# Allegro board CY8CKIT-043 Layout.brd
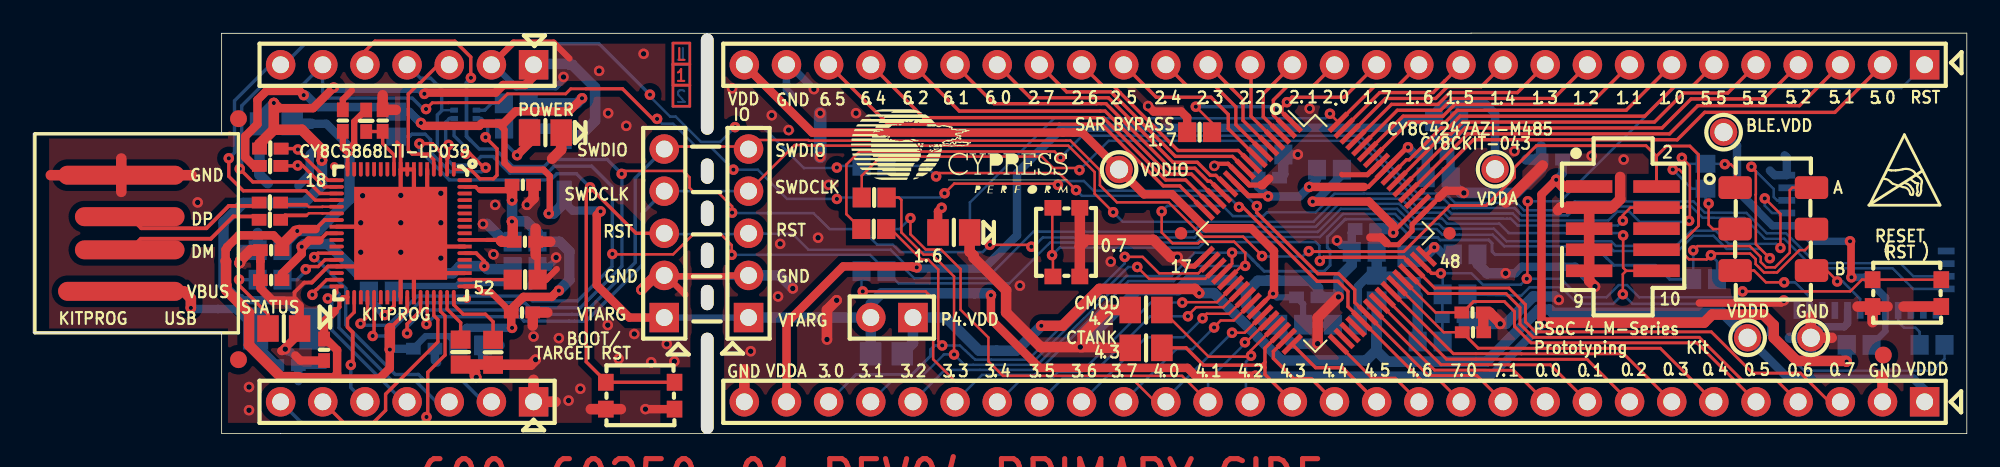
[diagram p0: board, top side]
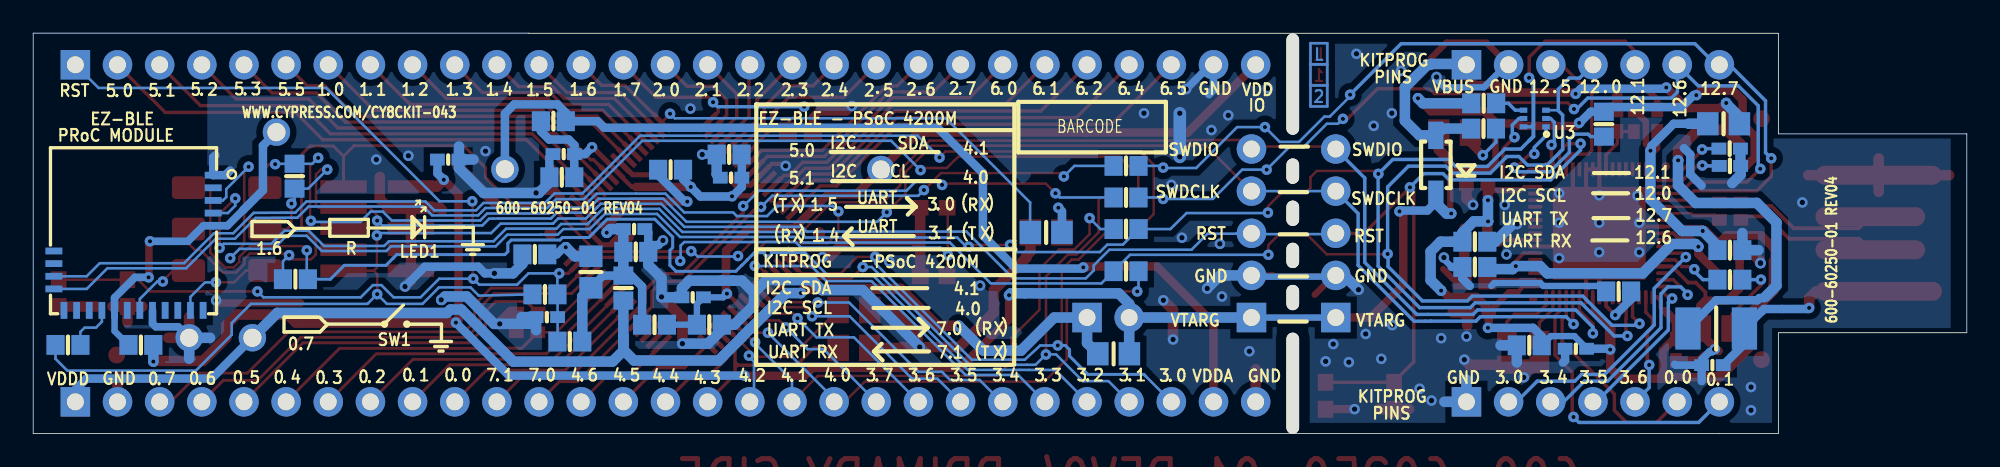
[diagram p1: board, bottom side, seen from below]

Outline 116.51 x 24.13 mm; copper layers: TOP, BOTTOM. Coordinates in mm from the lower left corner of the outline.
Outline path: 0,18.06 0,6.07 11.35,6.07 11.35,0 116.51,0 116.51,24.13 86.63,24.13 86.63,24.12 11.35,24.12 11.35,18.06 0,18.06

## Design rules (mm)
net group DP1: nets KP_DM KP_DP
net group DP2: nets KP_DM_P KP_DP_P
nets with their own width: min track width 0.635; nets GND_SIGNAL KP_VCCD KP_VDD P4_VDDD VBUS VCCD VTARG

## Placement (name value [footprint] x y rotation side)
C1  0.1 uF  [C-CC0402]  18.66 18.86 90 top
C2  0.1 uF  [C-CC0402]  21.06 18.86 90 top
C3  1.0 uF  [C-CC0603]  70.28 18.16 180 top
C4  0.1 uF  [C-CC0402]  29.5 14.99 0 top
C5  0.1 uF  [C-CC0402]  29.63 11.56 0 top
C6  0.1 uF  [C-CC0402]  14.34 11.05 180 top
C7  1.0 uF  [C-CC0603]  29.64 9.27 180 top
C8  0.1 uF  [C-CC0402]  14.34 9.25 180 top
C9  18 pF  [C-CC0402]  86.73 7.29 0 top
C10  2200 pF  [C-CC0805]  67.06 7.44 180 top
C11  0.1 uF  [C-CC0402]  29.45 7.29 0 top
C12  36 pF  [C-CC0402]  86.75 6.1 0 top
C13  10nF  [C-CC0805]  67.06 5.16 180 top
C14  0.1 uF  [C-CC0402]  17.53 5.04 270 top
C15  1.0 uF  [C-CC0603]  25.76 4.9 270 top
C16  1.0 uF  [C-CC0603]  27.71 4.89 270 top
C17  1.0 uF  [C-CC0603]  74.57 16.81 0 bottom
C18  0.1 uF  [C-CC0402]  84.54 16.84 0 bottom
C19  0.1 uF  [C-CC0402]  91.5 16.51 180 bottom
C20  0.1 uF  [C-CC0402]  74.46 15.42 0 bottom
C21  1.0 uF  [C-CC0603]  84.66 15.44 0 bottom
C22  0.1 uF  [C-CC0402]  80.3 12.32 180 bottom
C23  1.0 uF  [C-CC0603]  29.64 11.56 180 bottom
C24  1.0 uF  [C-CC0603]  80.2 10.95 180 bottom
C25  1.0 uF  [C-CC0603]  14.27 11.05 180 bottom
C26  1.0 uF  [C-CC0603]  86.28 10.79 0 bottom
C27  1.0 uF  [C-CC0603]  29.64 10.03 180 bottom
C28  1.0 uF  [C-CC0603]  20.98 8.56 0 bottom
C29  0.1 uF  [C-CC0402]  76.77 8.2 0 bottom
C30  0.1 uF  [C-CC0402]  85.56 7.01 0 bottom
C31  1.0 uF  [C-CC0603]  75.77 6.55 180 bottom
C32  1.0 uF  [C-CC0603]  26.37 5.31 0 bottom
C33  0.1 uF  [C-CC0402]  23.56 5.11 0 bottom
C34  0.1 uF  [C-CC0402]  15.33 4.11 0 bottom
D1  MBR0520L  [SOD-123]  31.99 16.19 90 bottom
F1  PTC Resettable Fuse  [R-CR1210]  15.1 6.32 180 bottom
J1  CONN 29  [RECP29X1-VERT]  113.97 22.23 270 top
J2  CONN 29  [RECP29X1-VERT]  113.97 1.91 270 top
J3  HDR 1x5  [HDR5X1]  43.1 6.99 0 top
J4  -  [HDR2]  53.01 6.99 90 top
J5  50MIL KEYED SMD  [FCI-20021521]  95.78 12.34 270 top
J6  USB FINGER  [USB-FINGER]  5.51 8.56 0 top
J7  HDR 1x5  [HDR5X1]  38.02 6.99 0 top
J8  HDR 1x7  [HDR7X1]  30.15 1.91 90 top
J9  HDR 1x7  [HDR7X1]  30.15 22.23 90 top
L1  330 OHM @ 100MHz  [R-CR0603]  85.17 18.82 180 bottom
L2  330 OHM @ 100MHz  [R-CR0603]  80.95 8.76 270 bottom
L3  330 OHM @ 100MHz  [R-CR0603]  110.02 5.33 0 bottom
LED1  LED  [CR-LED0805_1]  55.47 12.12 180 top
LED2  POWER LED Amber  [CR-LED0805_1]  30.86 18.14 180 top
LED3  Status LED Green  [CR-LED0805]  15.1 6.32 180 top
NOREF  -  []  216.88 -140.11 0 top
NOREF#2  -  []  215.1 -114.71 0 top
NOREF#3  -  []  40.82 24.51 0 top
NOREF#4  -  []  0 6.69 0 top
NOREF#5  -  [unnamed#2]  26.13 8.12 90 top
NOREF#6  -  [unnamed#3]  40.61 3.02 0 top
NOREF#7  -  []  -214.2 -216.79 0 top
NOREF#8  -  [unnamed#4]  40.61 13.27 0 top
NOREF#9  -  [unnamed#5]  12.37 18.97 0 top
NOREF#10  -  []  11.35 24.26 0 top
NOREF#11  -  []  113.93 -47.94 0 top
NOREF#12  -  []  0 18.06 0 top
NOREF#13  -  []  8.05 25.53 0 top
NOREF#14  -  []  108.89 0 90 top
NOREF#15  -  [unnamed#4]  40.61 15.81 0 top
NOREF#16  -  [unnamed#3]  40.61 21.06 0 top
NOREF#17  -  []  -1.63 6.07 90 top
NOREF#18  -  []  96.47 16.56 0 top
NOREF#19  -  [unnamed#2]  18.14 16.1 90 top
NOREF#20  -  []  40.69 -8.76 0 top
NOREF#21  -  [unnamed#4]  40.61 10.73 0 top
NOREF#22  -  [unnamed#5]  12.37 4.45 0 top
NOREF#23  -  [unnamed#5]  111.48 4.72 0 top
NOREF#24  -  [unnamed#4]  40.61 8.19 0 top
NOREF#25  -  []  58.66 12.06 180 bottom
NOREF#26  -  []  -87.45 -141.35 180 bottom
NOREF#27  -  []  38.6 12.06 180 bottom
R1  4.7K  [R-CR0402]  20.07 18.85 270 top
R2  15K  [R-CR0402]  14.29 17.17 0 top
R3  15K  [R-CR0402]  14.27 16.13 0 top
R4  22E  [R-CR0402]  14.26 13.92 0 top
R5  22E  [R-CR0402]  14.26 12.88 0 top
R6  2.2K  [R-CR0603]  29.11 19.9 180 bottom
R7  ZERO  [R-CR0805]  14.66 18.67 180 bottom
R8  2.2K  [R-CR0603]  21.87 18.64 270 bottom
R9  560 ohm  [R-CR0603]  29.12 18.38 0 bottom
R10  30K  [R-CR0402]  14.29 17.17 180 bottom
R11  ZERO  [R-CR0603]  50.66 16.13 180 bottom
R12  30K  [R-CR0402]  14.27 16.13 180 bottom
R13  ZERO  [R-CR0603]  50.66 14.22 180 bottom
R14  ZERO  [R-CR0603]  50.66 9.78 0 bottom
R15  560 ohm  [R-CR0805]  55.47 12.12 0 bottom
R16  ZERO  [R-CR0603]  100.71 9.3 0 bottom
R17  ZERO  [R-CR0603]  50.66 12.32 180 bottom
R18  ZERO  [R-CR0603]  100.76 15.51 270 bottom
R19  820 ohm  [R-CR0603]  14.27 9.27 180 bottom
R20  ZERO  [R-CR0603]  85.67 8.38 0 bottom
R21  ZERO  [R-CR0603]  79.07 6.55 180 bottom
R22  ZERO  [R-CR0805]  51.41 4.8 180 bottom
R23  4.7K  [R-CR0603]  84.18 5.54 0 bottom
R24  ZERO  [R-CR0603]  78.11 15.9 0 bottom
R25  ZERO  [R-CR0805]  82.91 9.73 90 bottom
R26  ZERO  [R-CR0603]  114.41 5.33 0 bottom
R27  ZERO  [R-CR0603]  50.65 12.32 180 top
R28  ZERO  [R-CR0603]  50.67 14.22 180 top
SW1  SW  [SWITCH-4PIN]  62.26 11.53 0 top
SW2  SW  [SWITCH-4PIN]  112.9 8.46 270 top
SW3  Switch  [SWITCH-4PIN]  36.58 2.27 270 top
SW4  DPDT  [CFP250P580X350-6L0N_1]  104.85 12.32 270 top
TP1  RED  [TP_43_65]  88.09 15.93 0 top
TP2  RED  [TP_43_65]  103.3 5.77 0 top
TP3  RED  [TP_43_65]  65.43 15.91 0 top
TP4  RED  [TP_43_65]  101.85 18.16 0 top
TP5  RED  [TP_43_65]  107.11 5.77 0 top
U1  CY8C5868LTI-LP039 QFN68  [QFN68_8X8MM]  22.14 12.06 270 top
U2  CY8C4247AZI-M485  [QFP50P1212X1212X160-64L15N]  77.25 12.06 225 top
U3  NTZD3152P  [SOT563]  26.04 18.99 0 bottom
U4  CYBLE-022001-00  [BLE_MODULE_B]  110.9 12.62 0 bottom

## Library data of the parts
C1 C2 C4-C6 C8 C11 C14 C18-C20 C22 C29 C30 C33 C34 = 0.1 uFd 0402: alternate symbols: (C-CC0402_A)
C3 C7 C15-C17 C21 C23-C28 C31 C32 = 1_0.0 uFd 0603 X5R 25V 10%: alternate symbols: (C-CC0603_A)
C9 C12 = CAP NP
C10 C13 = CAP
D1 = TMP_134158
F1 = FUSE_4
J1 = CONN TRBLK 28_1
J2 = CONN TRBLK 28_0
J3 J7 = HDR 1x5 Keyed 0.1_M
J4 = HEADER 2_0
J5 = 10 Pin Header 50mil Keyed SMD
J6 = USB MINI AB Right Angle_0
J8 J9 = 8x1 RECPT VERT_0
L1-L3 = INDUCTOR FERRITE
LED1 = LED Green 0805_2
LED2 LED3 = LED Green 0805
R1 R23 = 4_0.7K ohm 5% 0603: alternate symbols: (R-CR0603_A)
R2 R3 R9 R10 R12 R15 = RESISTOR
R4 R5 = 24 ohm 5% 0603 _0
R6 R8 = 2_0.2K ohm 5% 0603: alternate symbols: (R-CR0603_A)
R7 R11 R13 R14 R16-R18 R20-R22 R24-R28 = 330 ohm 5% 0805_1
R19 = 330 ohm 5% 0805_0
SW1-SW3 = Switch Pushbutton
SW4 = SPDT_1
TP1-TP5 = TEST_POINT
U1 = CY8C5868LTI-LP039 QFN68
U2 = PSoC 4200_1
U3 = FET DUAL P-CH 20V 430mA SOT-563
U4 = CY8CTMA300-48LQXI_11

## Footprints (pads in the part's own frame, mm; a bottom-side part is the same pattern mirrored in y, then rotated)
BLE_MODULE_B
  rect 1.016x0.406 smd: 1(-5.232,-2.946) 2(-5.232,-2.184) 3(-5.232,-1.422) 4(-5.232,-0.66) 5(-5.232,0.102) 18(4.369,3.912) 19(4.369,3.15) 20(4.369,2.388) 21(4.369,1.626)
  rect 0.406x1.016 smd: 6(-4.623,5.207) 7(-3.861,5.207) 8(-3.099,5.207) 9(-2.337,5.207) 10(-1.575,5.207) 11(-0.813,5.207) 12(-0.051,5.207) 13(0.711,5.207) 14(1.473,5.207) 15(2.235,5.207) 16(2.997,5.207) 17(3.759,5.207)
C-CC0402
  rect 0.889x0.711 smd: 1(-0.648,0) 2(0.648,0)
C-CC0603
  rect 1.092x1.194 smd: 1(-0.749,0) 2(0.749,0)
C-CC0805
  rect 1.295x1.6 smd: 1(-0.953,0) 2(0.953,0)
CFP250P580X350-6L0N_1
  custom 1.372x2.012 smd: 1(-2.499,-2.301) 2(0,-2.301) 3(2.499,-2.301) 4(-2.499,2.301) 5(0,2.301) 6(2.499,2.301)
CR-LED0805
  rect 1.295x1.6 smd: 1(-0.953,0) 2(0.953,0)
CR-LED0805_1
  rect 1.295x1.6 smd: 1(-0.953,0) 2(0.953,0)
FCI-20021521
  rect 0.759x2.799 smd: 1(-2.54,-2.029) 2(-2.54,2.029) 3(-1.27,-2.029) 4(-1.27,2.029) 5(0,-2.029) 6(0,2.029) 7(1.27,-2.029) 8(1.27,2.029) 9(2.54,-2.029) 10(2.54,2.029)
HDR2
  rect 1.778x1.778 hole 1.016: 1(0,0)
  round 1.778 hole 1.016: 2(0,2.54)
HDR5X1
  rect 1.778x1.778 hole 1.016: 1(0,0)
  round 1.778 hole 1.016: 2(0,2.54) 3(0,5.08) 4(0,7.62) 5(0,10.16)
HDR7X1
  rect 1.778x1.778 hole 1.016: 1(0,0)
  round 1.778 hole 1.016: 2(0,2.54) 3(0,5.08) 4(0,7.62) 5(0,10.16) 6(0,12.7) 7(0,15.24)
QFN68_8X8MM
  custom 0.864x0.23 smd: 1(-3.851,3.2) 2(-3.851,2.799) 3(-3.851,2.4) 4(-3.851,1.999) 5(-3.851,1.6) 6(-3.851,1.199) 7(-3.851,0.8) 8(-3.851,0.399) 9(-3.851,0) 10(-3.851,-0.399) 11(-3.851,-0.8) 12(-3.851,-1.199) 13(-3.851,-1.6) 14(-3.851,-1.999) 15(-3.851,-2.4) 16(-3.851,-2.799) 17(-3.851,-3.2) 35(3.851,-3.2) 36(3.851,-2.799) 37(3.851,-2.4) 38(3.851,-1.999) 39(3.851,-1.6) 40(3.851,-1.199) 41(3.851,-0.8) 42(3.851,-0.399) 43(3.851,0) 44(3.851,0.399) 45(3.851,0.8) 46(3.851,1.199) 47(3.851,1.6) 48(3.851,1.999) 49(3.851,2.4) 50(3.851,2.799) 51(3.851,3.2)
  custom 0.23x0.864 smd: 18(-3.2,-3.851) 19(-2.799,-3.851) 20(-2.4,-3.851) 21(-1.999,-3.851) 22(-1.6,-3.851) 23(-1.199,-3.851) 24(-0.8,-3.851) 25(-0.399,-3.851) 26(0,-3.851) 27(0.399,-3.851) 28(0.8,-3.851) 29(1.199,-3.851) 30(1.6,-3.851) 31(1.999,-3.851) 32(2.4,-3.851) 33(2.799,-3.851) 34(3.2,-3.851) 52(3.2,3.851) 53(2.799,3.851) 54(2.4,3.851) 55(1.999,3.851) 56(1.6,3.851) 57(1.199,3.851) 58(0.8,3.851) 59(0.399,3.851) 60(0,3.851) 61(-0.399,3.851) 62(-0.8,3.851) 63(-1.199,3.851) 64(-1.6,3.851) 65(-1.999,3.851) 66(-2.4,3.851) 67(-2.799,3.851) 68(-3.2,3.851)
  rect 5.601x5.601 smd: 69(0,0)
QFP50P1212X1212X160-64L15N
  round 0.749 smd: (-5.72,5.72) (5.72,-5.72)
  rect 0.3x1.539 smd: 1(-3.749,-5.715) 2(-3.251,-5.715) 3(-2.751,-5.715) 4(-2.25,-5.715) 5(-1.75,-5.715) 6(-1.25,-5.715) 7(-0.749,-5.715) 8(-0.249,-5.715) 9(0.249,-5.715) 10(0.749,-5.715) 11(1.25,-5.715) 12(1.75,-5.715) 13(2.25,-5.715) 14(2.751,-5.715) 15(3.251,-5.715) 16(3.749,-5.715) 33(3.749,5.715) 34(3.251,5.715) 35(2.751,5.715) 36(2.25,5.715) 37(1.75,5.715) 38(1.25,5.715) 39(0.749,5.715) 40(0.249,5.715) 41(-0.249,5.715) 42(-0.749,5.715) 43(-1.25,5.715) 44(-1.75,5.715) 45(-2.25,5.715) 46(-2.751,5.715) 47(-3.251,5.715) 48(-3.749,5.715)
  rect 1.539x0.3 smd: 17(5.715,-3.749) 18(5.715,-3.251) 19(5.715,-2.751) 20(5.715,-2.25) 21(5.715,-1.75) 22(5.715,-1.25) 23(5.715,-0.749) 24(5.715,-0.249) 25(5.715,0.249) 26(5.715,0.749) 27(5.715,1.25) 28(5.715,1.75) 29(5.715,2.25) 30(5.715,2.751) 31(5.715,3.251) 32(5.715,3.749) 49(-5.715,3.749) 50(-5.715,3.251) 51(-5.715,2.751) 52(-5.715,2.25) 53(-5.715,1.75) 54(-5.715,1.25) 55(-5.715,0.749) 56(-5.715,0.249) 57(-5.715,-0.249) 58(-5.715,-0.749) 59(-5.715,-1.25) 60(-5.715,-1.75) 61(-5.715,-2.25) 62(-5.715,-2.751) 63(-5.715,-3.251) 64(-5.715,-3.749)
R-CR0402
  rect 0.889x0.711 smd: 1(-0.648,0) 2(0.648,0)
R-CR0603
  rect 1.092x1.194 smd: 1(-0.749,0) 2(0.749,0)
R-CR0805
  rect 1.295x1.397 smd: 1(-0.953,0) 2(0.953,0)
R-CR1210
  rect 1.524x2.54 smd: 1(-1.702,0) 2(1.702,0)
RECP29X1-VERT
  rect 1.778x1.778 hole 1.016: 1(0,0)
  round 1.778 hole 1.016: 2(0,-2.54) 3(0,-5.08) 4(0,-7.62) 5(0,-10.16) 6(0,-12.7) 7(0,-15.24) 8(0,-17.78) 9(0,-20.32) 10(0,-22.86) 11(0,-25.4) 12(0,-27.94) 13(0,-30.48) 14(0,-33.02) 15(0,-35.56) 16(0,-38.1) 17(0,-40.64) 18(0,-43.18) 19(0,-45.72) 20(0,-48.26) 21(0,-50.8) 22(0,-53.34) 23(0,-55.88) 24(0,-58.42) 25(0,-60.96) 26(0,-63.5) 27(0,-66.04) 28(0,-68.58) 29(0,-71.12)
SOD-123
  rect 1.651x0.914 smd: 1(-1.778,0) 2(1.778,0)
SOT563
  rect 0.457x0.305 smd: 1(-0.676,0.5) 2(-0.676,0) 3(-0.676,-0.5) 4(0.676,-0.5) 5(0.676,0) 6(0.676,0.5)
SWITCH-4PIN
  rect 1.016x0.94 smd: 1A(-0.81,2.07) 1B(-0.81,-2.07) 2A(0.81,2.07) 2B(0.81,-2.07)
TP_43_65
  round 1.651 hole 1.092: 1(0,0)
unnamed#2
  round 0.508 smd: (0,0)
unnamed#3
  oval 0.762x6.096 hole 0.762x6.096 unplated: (0,0)
unnamed#4
  oval 0.762x1.524 hole 0.762x1.524 unplated: (0,0)
unnamed#5
  round 1.016 smd: (0,0)
USB-FINGER
  oval 7.62x1.143 smd: 1(-0.203,0) 4(-0.203,7.003)
  oval 6.604x1.143 smd: 2(0.305,2.502) 3(0.305,4.501)

## Nets
GND_SIGNAL: C1.2 C2.2 C3.2 C4.2 C5.2 C6.2 C7.1 C8.2 C9.2 C10.2 C11.2 C12.2 C13.2 C14.2 C15.2 C16.2 C17.2 C18.2 C19.2 C20.2 C21.2 C22.2 C23.2 C24.2 C25.2 C26.2 C27.1 C28.2 C29.2 C30.2 C31.2 C32.2 C33.2 C34.2 J1.28 J2.2 J2.29 J3.2 J5.3 J5.5 J5.7 J5.9 J6.4(GND) J7.2 J8.1 J9.2 LED1.1(K) LED2.1(K) LED3.1(K) R10.2 R12.2 SW1.2A SW1.2B SW2.2A SW2.2B SW3.2A SW3.2B TP5.1 U1.5(VSSB) U1.7(VBOOST) U1.8(VBAT) U1.9(VSSD#9) U1.25(VSSD#25) U1.31(P3_2) U1.43(VSSA) U1.45(VSSD#45) U1.54(P0_5) U1.58(VSSD#58) U1.69(EPAD) U2.10(VSSA#10) U2.17(VSSIO) U2.49(VSSD) U2.57(VSSA#57) U4.1(GND1) U4.10(GND2)
VBUS: D1.2(ANODE) F1.1 J9.1 R2.1 R7.2 R9.2
VCCA: C28.1 U1.42(VCCA)
VCCD: C26.1 R25.2 U2.48(VCCD)
VDDA: J2.28 L1.2 TP1.1
VDDD: J2.1 J4.1 L2.2 R22.1 TP2.1
/XRES: C30.1 J1.1 R20.1 R23.2 SW2.1A SW2.1B U2.47(XRES)
BLE_RX: R28.2 U4.18(P1.4)
BLE_SWDCLK: SW4.3 U4.7(P0.7)
BLE_SWDIO: SW4.6 U4.11(P0.6)
BLE_TX: R27.2 U4.19(P1.5)
BLE_VDD: L3.2 TP4.1 U4.5(VDDR) U4.13(VDD)
BLE_XRES: R26.1 U4.14(XRES)
I2C_SCL: J9.4 R14.2 U1.38(SIO, I2C1_SCL P12_0) U3.3(D2) U4.3(P5.1)
I2C_SDA: J9.5 R17.2 U1.39(SIO, I2C1_SDA P12_1) U3.6(D1) U4.4(P5.0)
KP_DM: J6.2(DM) R5.1
KP_DM_P: R5.2 U1.23(P15_7 DM)
KP_DP: J6.3(DP) R4.1
KP_DP_P: R4.2 U1.22(P15_6 DP)
KP_P0_0: J8.6 U1.48(P0_0)
KP_P0_1: J8.7 U1.49(P0_1)
KP_P0_2: C15.1 U1.50(P0_2)
KP_P0_3: C16.1 U1.51(P0_3)
KP_P0_4: C7.2 U1.53(P0_4)
KP_P0_6: U1.55(P0_6)
KP_P0_7: U1.56(P0_7)
KP_P1_6: R2.2 R10.1 U1.18(P1_6)
KP_P1_7: R3.2 R12.1 U1.19(P1_7)
KP_P2_6: U1.1(P2_6) U3.5(G2)
KP_P2_7: U1.2(P2_7) U3.2(G1)
KP_P3_0: J8.2 U1.29(P3_0)
KP_P3_1: R19.1 U1.30(P3_1)
KP_P3_4: J8.3 U1.33(P3_4)
KP_P3_5: J8.4 U1.34(P3_5)
KP_P3_6: J8.5 U1.36(P3_6)
KP_P12_5: J9.3 U1.4(P12_5 I2C0_SDA, SIO)
KP_VCCD: C8.1 C27.2 U1.26(VCCD#26) U1.57(VCCD#57)
KP_VDD: C1.1 C4.1 C5.1 C6.1 C11.1 C14.1 C23.1 C25.1 C32.1 C33.1 R1.1 R7.1 U1.17(VDDIO1) U1.24(VDDD#24) U1.35(VDDIO3) U1.44(VDDA) U1.52(VDDIO0) U1.59(VDDD#59) U1.67(VDDIO2)
KP_XRES: C2.1 R1.2 U1.10(XRES)
P0_0: J2.10 U2.39(P0.0)
P0_1: J2.9 U2.40(P0.1)
P0_2: J2.8 U2.41(P0.2)
P0_3: J2.7 U2.42(P0.3)
P0_4: C12.1 J2.6 U2.43(P0.4)
P0_5: C9.1 J2.5 U2.44(P0.5)
P0_6: J2.4 U2.45(P0.6)
P0_7: J2.3 SW1.1A SW1.1B U2.46(P0.7)
P1_0: J1.7 U2.58(P1.0)
P1_1: J1.8 U2.59(P1.1)
P1_2: J1.9 U2.60(P1.2)
P1_3: J1.10 U2.61(P1.3)
P1_4: J1.11 U2.62(P1.4)
P1_5: J1.12 U2.63(P1.5)
P1_6: J1.13 R15.2 U2.64(P1.6)
P1_7: C3.1 J1.14 U2.1(P1.7/VREF)
P2_0: J1.15 U2.2(P2.0)
P2_1: J1.16 U2.3(P2.1)
P2_2: J1.17 U2.4(P2.2)
P2_3: J1.18 U2.5(P2.3)
P2_4: J1.19 U2.6(P2.4)
P2_5: J1.20 U2.7(P2.5)
P2_6: J1.21 U2.8(P2.6)
P2_7: J1.22 U2.9(P2.7)
P3_0: J2.27 R27.1 U2.18(P3.0)
P3_1: J2.26 R28.1 U2.19(P3.1)
P3_2: J2.25 R16.1 SW4.4 U2.20(P3.2)
P3_3: J2.24 R18.1 SW4.1 U2.21(P3.3)
P3_4: J2.23 U2.22(P3.4)
P3_5: J2.22 U2.23(P3.5)
P3_6: J2.21 U2.24(P3.6)
P3_7: J2.20 U2.25(P3.7)
P4_0: J2.19 R14.1 U2.27(P4.0)
P4_1: J2.18 R17.1 U2.28(P4.1)
P4_2: C10.1 J2.17 U2.29(P4.2)
P4_3: C13.1 J2.16 U2.30(P4.3)
P4_4: J2.15 U2.31(P4.4)
P4_5: J2.14 U2.32(P4.5)
P4_6: J2.13 U2.33(P4.6)
P4_VDDA: C17.1 C18.1 C20.1 C21.1 L1.1 R24.1 U2.11(VDDA#11) U2.56(VDDA#56)
P4_VDDD: C22.1 C24.1 L2.1 R21.1 R23.1 R24.2 R25.1 U2.50(VDDD)
P4_VDDIO: C29.1 C31.1 J1.29 R21.2 TP3.1 U2.26(VDDIO)
P5_0: J1.2 U2.51(P5.0)
P5_1: J1.3 U2.52(P5.1)
P5_2: J1.4 U2.53(P5.2)
P5_3: J1.5 U2.54(P5.3)
P5_5: J1.6 U2.55(P5.5)
P6_0: J1.23 U2.12(P6.0)
P6_1: J1.24 U2.13(P6.1)
P6_2: J1.25 U2.14(P6.2)
P6_4: J1.26 U2.15(P6.4)
P6_5: J1.27 U2.16(P6.5)
P7_0: J2.12 R11.1 U2.37(P7.0)
P7_1: J2.11 R13.1 U2.38(P7.1)
RESET: J3.3 J5.10 J7.3 R20.2 R26.2 SW3.1A SW3.1B U1.3(P12_4 I2C0_SCL, SIO)
SWDCLK: J3.4 J5.4 J7.4 R18.2 SW4.2 U1.47(SIO_P12_3)
SWDIO: J3.5 J5.2 J7.5 R16.2 SW4.5 U1.46(SIO_P12_2)
UART RX: J9.6 R13.2 U1.20(P12_6_SIO)
UART TX: J9.7 R11.2 U1.21(P12_7_SIO)
VTARG: C19.1 D1.1(CATHODE) J3.1 J4.2 J5.1 J7.1 L3.1 R3.1 R6.1 R8.1 R22.2
N11032: C34.1 F1.2 J6.1(VBUS)
N11130: LED2.2(A) R9.1
N039981: R8.2 U3.1(S1)
N046484: R6.2 U3.4(S2)
N13017862: LED1.2(A) R15.1
N16779589: LED3.2(A) R19.2

Pads without a net: J5 6 8; U1 6 11 12 13 14 15 16 27 28 32 37 40 41 60 61 62 63 64 65 66 68; U2 34 35 36; U4 2 6 8 9 12 15 16 17 20 21

## Via types
v1: diameter 0.635, hole 0.254, TOP to BOTTOM, 126 vias
v2: diameter 0.635, hole 0.33, TOP to BOTTOM, 74 vias

## Routing (per net, layer and track width the routed paths; a pad name or vN(x,y) marks a point on that pad's centre or on a via; arc(x,y) is an arc through that point)
GND_SIGNAL: length 308.4
  TOP w0.229: U1.9 22.14,17.33 21.92,17.55 ; U1.31 17.76,10.07 16.79,9.09 16.33,9.09 15.75,8.51 15.75,8
  TOP w0.254: 22.94,12.87 U1.69 ; 22.94,12.87 23.74,13.67 U1.5 ; 22.94,12.87 U1.7 U1.8 U1.9 U1.69 ; U1.69 20.14,10.07 U1.31 ; U1.69 21.74,12.46 U1.25 ; U1.69 22.94,11.26 ; U1.69 U1.43 ; 83.94,13.45 83.94,13.46 84.7,14.21 ; U1.45 22.94,11.26 ; 22.94,11.26 24.54,9.66 U1.54 ; 22.94,11.26 U1.58 ; v2(71.17,16.13) 71.3,16.26 72,16.26 U2.10
  TOP w0.305: 81.12,16.28 81.08,16.28 80.39,15.6 78.87,15.6 78.84,15.62 ; 70.56,10.68 69.97,10.08 69.49,10.08 v2(68.95,10.63) ; 81.54,11.48 81.65,11.38 82.25,11.38 83.09,12.21 83.09,12.6 83.94,13.45 ; 74,14.97 73.28,14.97 U2.10
  TOP w0.381: 31.55,9.91 30.91,9.27 C7.1 30.39,10.65 30.28,10.77 ; 38.18,9.47 41.78,9.47 41.83,9.53 J3.2 ; J9.2 28.94,23.56 31.36,23.56 32.31,22.61 ; 38.19,9.46 39.29,8.36 ; C1.2 18.66,20.13 19.2,20.68
  TOP w0.457: v2(105.49,8.02) 105.48,8.02 105.32,7.86 100.4,7.86
  TOP w0.508: J7.2 38.13,9.53 38.19,9.46 ; SW3.2A v2(36.89,1.46) 36.88,1.47 ; v2(86.21,14.5) 86.08,14.63 85.12,14.63 84.7,14.21 ; C14.2 16.1,4.39 15.8,4.7 ; 74.47,15.37 74.08,14.97 74,14.97 74.03,15 ; C6.2 13.69,11.05 13.69,10.39 13.69,10.39 C8.2 13.69,8.84 13.7,8.82 13.71,8.73 14.44,8 15.75,8 16.05,7.7 LED3.1 16.05,6.03 14.99,4.97 14.95,4.97 ; 81.54,11.48 81.21,11.81 80.57,11.81 ; v2(67.18,19.74) 67.51,19.41 69.18,19.41 69.53,19.05 C3.2
  TOP w0.635: 1.06,15.57 J6.4 ; J6.4 9.55,15.57 ; J6.4 5.31,16.57 ; J6.4 5.31,14.56 ; C5.2 30.28,12.35 ; C5.2 30.28,10.77 ; C5.2 31.16,11.56 ; C6.2 13.11,11.05 12.47,10.41 12.47,10.31 v2(12.44,10.27) ; v2(68.95,10.63) 68.54,10.63 67.5,11.67 63.46,11.67 63.07,11.28 ; v2(47.83,5.66) 47.83,7.44 v2(48.41,8.03) ; C12.2 87.38,6.12 C9.2 87.76,7.29 88.39,6.65 88.39,6.61 v2(88.4,6.6) ; 33.6,1.46 SW3.2B 35.41,1.46 ; 26.15,4.15 27.7,4.15 C16.2 29.97,4.14 v2(30.28,4.45) ; 26.15,4.15 26.62,3.68 26.62,3.45 v2(26.7,3.38) ; 26.15,4.15 C15.2 ; J5.3 92.02,13.61 91.87,13.46 ; J5.3 95.12,13.61 95.62,14.11 95.62,15.46 ; J5.3 J5.5 J5.7 J5.9 93.75,9.2 v2(94.11,8.85) ; 30.15,3.23 J8.1 31.47,1.91 ; LED2.1 31.81,17.11 31.27,16.56 ; v2(29.75,13.78) 30.15,14.18 C4.2 ; 63.07,11.28 SW1.2A ; 63.07,11.28 SW1.2B ; 21.85,19.51 C2.2 21.06,20.39 ; 107.11,7.03 TP5.1 108.37,5.77 ; 30.1,6.5 C11.2 30.98,7.29 ; J2.2 111.43,3.38 111.35,3.45 ; v2(78.65,8.23) 77.39,6.97 v2(77.39,5.41) ; J7.2 37.52,9.53 v2(36.65,8.66) ; 109.93,7.65 SW2.2B ; SW2.2B 110.83,6.71 ; SW2.2B 111.74,7.65 ; LED1.1 56.43,10.96 56.67,10.72 56.67,10.59 58.62,8.64 58.62,7.29 60.71,5.21 v2(63.09,5.21) 63.23,5.21 ; SW2.2A 112.7,7.65 ; J2.29 42.85,3.86 ; C10.2 64.73,7.44 63.23,5.94 63.23,5.21 ; C13.2 64.22,5.16 64.17,5.21 63.23,5.21 ; 90.95,16.15 88.72,13.92
  BOTTOM w0.381: v2(31.51,10.6) 31.51,10.5 31.04,10.03 ; J7.2 38.1,9.45 43.03,9.45 J3.2 ; 28.66,8.89 28.48,9.07 25.7,9.07 25.52,8.89 22.1,8.89 21.75,8.54 C28.2 ; J9.2 27.74,22.23 29.1,20.87 31.48,20.87 31.95,21.34 v2(31.95,21.49)
  BOTTOM w0.457: TP5.1 107.77,6.43 109.12,6.43 109.32,6.63 U4.10 ; 17.6,4.17 17.55,4.11 C34.2 15.98,4.45 15.49,4.93 15.34,4.93 v2(15.19,5.08) ; 45.67,20.42 45.39,20.7 J1.28 45.57,22.23 v2(47.04,20.75)
  BOTTOM w0.508: C22.2 79.45,12.12 79.45,11.35 ; C24.2 79.45,11.35 ; 79.45,11.35 78.84,11.35 v2(78.56,11.63) ; C18.2 85.41,16.62 C21.2 ; 15.98,14.94 16.66,15.62 16.66,16.81 17.04,17.2 ; 105.54,16.76 105.66,16.64 U4.1 104.93,15.57 104.65,15.85 ; C17.2 v2(76.2,16.81) ; v2(94.11,8.85) 92.91,10.05 89.69,10.05 89.3,9.65 v2(88.72,9.65) ; C34.2 15.98,3.15 ; 31.04,10.03 C27.1 30.39,9.33 29.95,8.89 ; 24.33,4.27 24.21,4.39 C33.2 ; v2(12.43,10.26) 12.43,10.27 v2(12.44,10.27) 12.47,10.31
  BOTTOM w0.635: C23.2 28.42,11.56 27.35,12.62 v2(27.1,12.62) ; 30.15,3.23 J8.1 31.47,1.91 ; v2(77.39,5.41) 75.85,5.41 75.02,6.24 C31.2 74.27,6.55 73.08,7.74 73.08,8.49 ; v2(88.72,9.65) 87.6,9.65 87.03,10.22 C26.2 ; C20.2 75.32,15.63 C17.2 ; C19.2 90.86,17.3 ; C19.2 90.86,15.98 89.37,14.5 v2(86.21,14.5) 86.04,14.5 85.41,15.13 C21.2 ; C19.2 89.98,16.51 ; C30.2 87.09,7.01 ; C30.2 86.21,6.22 ; C30.2 86.61,6.6 v2(88.4,6.6) 88.73,6.6 90.39,8.26 91.7,8.26 91.9,8.05 v2(91.93,8.05) ; 27.11,4.28 C32.2 28.09,5.31 ; 13.53,12.08 C25.2 12.55,11.05 ; 73.08,8.49 73.8,9.21 74.38,9.21 74.38,9.21 75.04,9.21 75.04,9.21 76.97,9.21 77.42,8.76 C29.2 78.63,8.2 v2(78.65,8.23) 78.65,9.36 79.45,10.16 C24.2 ; 73.08,8.49 72.33,9.25 69.6,9.25 68.99,8.64 66.52,8.64 v2(63.09,5.21) ; 107.11,4.51 TP5.1 105.85,5.77 ; J7.2 37.52,9.53 v2(36.65,8.66) ; R10.2 13.64,16.14 R12.2 13.63,15.6 14.14,15.09 ; J3.2 44.98,9.53 v2(45.77,8.74)
  BOTTOM w0.762: v2(47.42,16.67) v2(47.42,19.3)
  vias: v2(9.91,13.92) v2(13,2.79) v2(13,1.4) v2(19.74,12.7) v2(19.74,10.92) v2(19.85,14.33) v2(22.15,14.35) v2(22.15,12.7) v2(22.15,10.92) v2(24.56,14.48) v2(24.56,12.7) v2(24.56,10.57) v2(27.74,10.79) v2(27.84,13.78) v2(30.15,5.84) v2(31.67,5.74) v2(32.26,1.98) v2(32.97,2.69) v2(34.1,21.86) v2(34.65,19.3) v2(34.62,6.53) v2(35.28,4.5) v2(35.74,18.54) v2(36.22,5.99) v2(36.78,22.89) v2(37.24,4.29) v2(38.18,5.38) v2(38.63,4.34) v2(42.11,20.8) v2(43.23,4.95) v2(44.5,19.18) v2(44.88,8.26) v2(45.01,11.43) v2(45.52,18.29) v2(47.29,11.8) v2(47.93,14.99) v2(49.58,19.3) v2(59.45,8.91) v2(64.93,10.36) v2(76.91,19.58) v2(89.26,17.02) v2(93.9,16.74) v2(95.83,16.51)
VBUS: length 56.3
  TOP w0.508: v1(18.11,20.85) 16.87,19.61 14.86,19.61 14.55,19.92 v1(14.5,19.92) ; J9.1 30.15,21.51 29.64,21.01 28.32,21.01 27.86,20.55 23.65,20.55 v1(23.57,20.47)
  TOP w0.635: 14.5,18.31 16.18,18.31 17.4,17.09 17.4,16.46 v1(17.4,16.46) ; 14.5,18.31 13.64,17.45 R2.1 ; 14.5,18.31 v1(14.5,19.92)
  BOTTOM w0.381: 31.64,18.33 D1.2
  BOTTOM w0.508: 12.14,8.23 12.21,8.16 12.49,8.16 12.63,8.03 15.1,8.03 F1.1 ; v1(23.57,20.47) 23.26,20.78 18.18,20.78 v1(18.11,20.85)
  BOTTOM w0.635: v1(17.4,16.46) 17.4,16.46 17.4,14.96 16.33,13.89 12.65,13.89 11.47,12.72 11.47,8.9 12.14,8.23 ; R7.2 13.7,19.09 14.5,19.88 v1(14.5,19.92) ; J9.1 30.2,22.28 32.28,22.28 32.33,22.23 32.49,22.23 33.86,20.86 33.86,18.85 32.98,17.97 D1.2 31.97,17.97 31.64,18.33 31.58,18.38 R9.2
VCCA: length 3.1
  TOP w0.229: U1.42 21.74,7.69 21.57,7.52 21.56,7.52 v1(21.18,7.14)
  BOTTOM w0.508: C28.1 20.23,8.09 v1(21.18,7.14)
VCCD: length 3.8
  TOP w0.254: 83.94,10.68 83.94,10.74 84.42,11.21 v1(84.42,11.22)
  BOTTOM w0.508: C26.1 84.97,10.79 84.62,11.15 84.5,11.15 v1(84.42,11.22)
  BOTTOM w0.635: R25.2 83.88,10.68 84.42,11.22 v1(84.42,11.22)
VDDA: length 59.1
  TOP w0.508: J2.28 45.39,2.65 45.39,2.65 45.39,6.65 48.8,10.07 52.96,10.07 53.01,10.02 53.23,10.02 v1(53.24,10.01)
  BOTTOM w0.508: TP1.1 88.09,19.28 87.53,19.84 84.92,19.84 84.42,19.33 L1.2 82.5,18.82 82.11,18.43 62.02,18.43 59.28,15.69 59.28,11.94 57.28,9.94 53.31,9.94 v1(53.24,10.01)
VDDD: length 76
  TOP w0.635: v1(60.74,6.49) 62.02,6.49 64.25,8.71 70,8.71 v1(70.26,8.46)
  BOTTOM w0.508: J2.1 113.97,2.63 113.3,3.3 105.77,3.3 TP2.1
  BOTTOM w0.635: v1(70.26,8.46) 71.14,8.46 73.32,6.28 73.34,6.28 73.8,5.82 73.8,5.8 75.21,4.39 80.31,4.39 80.94,5.03 80.94,5.89 80.95,5.89 ; R22.1 53.01,5.45 J4.1 54.99,6.99 56.98,4.99 58.07,4.99 58.07,4.99 59.24,4.99 v1(60.74,6.49) ; TP2.1 101.8,7.26 91.57,7.26 91.37,7.47 90.71,7.47 87.58,4.33 81.6,4.33 80.95,4.98 80.95,5.89 ; 80.95,5.89 L2.2
/XRES: length 69.8
  TOP w0.152: v1(103,8.56) 109.48,8.56 110.19,9.27 SW2.1B SW2.1A ; v1(90.06,14) 90.03,13.97 90.03,9.36 v1(89.99,9.32)
  TOP w0.203: v1(84.82,9.65) 84.26,9.65 U2.47
  BOTTOM w0.152: J1.1 112.57,20.83 98.86,20.83 92.02,14 v1(90.06,14) ; R23.2 84.91,5.55 C30.1 84.91,8.37 R20.1 84.92,9.54 v1(84.82,9.65) 86.67,9.65 87.35,8.97 89.64,8.97 v1(89.99,9.32) 92.05,9.32 93.17,8.2 94.79,8.2 95.53,8.94 96.04,8.94 96.77,8.2 102.64,8.2 v1(103,8.56)
BLE_RX: length 72.3
  TOP w0.152: v1(63.04,15.88) 62.92,16 61.46,16 60.77,16.69 51.08,16.69 49.92,15.53 R28.2
  BOTTOM w0.152: v1(63.04,15.88) 64.81,17.64 79.81,17.64 83.33,14.12 85.01,14.12 85.55,13.59 85.81,13.59 89.26,13.59 89.7,13.14 92.47,13.14 93,13.68 99.92,13.68 100.59,13 103.1,12.99 104.36,11.73 105.51,11.73 107.29,9.96 112.04,9.96 113.28,8.71 U4.18
BLE_SWDCLK: length 6
  TOP w0.152: SW4.3 103.69,9.82 104.4,9.11 v1(105.5,9.11)
  BOTTOM w0.152: U4.7 107.04,8.23 106.16,9.11 105.5,9.11 v1(105.5,9.11)
BLE_SWDIO: length 4.3
  TOP w0.152: SW4.6 108.07,9.82 108.7,9.19 v1(108.7,9.16)
  BOTTOM w0.152: U4.11 110.08,8.11 109.03,9.16 v1(108.7,9.16)
BLE_TX: length 75.5
  TOP w0.152: v1(61.9,16.64) 61.54,16.99 49.78,16.99 49,16.21 49,13.22 R27.2
  BOTTOM w0.152: U4.19 113.29,9.47 112.5,10.26 107.42,10.26 105.62,12.06 104.46,12.06 103.23,13.3 101.18,13.31 100.72,13.31 100.72,13.31 100.05,13.98 92.88,13.98 92.34,13.45 89.83,13.45 89.38,13.89 85.67,13.89 85.1,14.47 83.42,14.47 79.94,17.95 63.21,17.95 v1(61.9,16.64)
BLE_VDD: length 19.9
  TOP w0.457: v1(109.47,11.58) 109.53,11.52 109.53,9.51 109.56,9.49 v1(109.56,9.41)
  BOTTOM w0.381: L3.2 111.61,6.17 U4.13
  BOTTOM w0.457: 103.86,13.46 104.8,12.52 U4.5 106.25,12.52 107.19,11.58 v1(109.47,11.58) ; v1(109.56,9.41) 110.38,9.41 111.61,8.18 U4.13
  BOTTOM w0.508: 103.86,13.46 102.67,14.66 102.67,17.35 TP4.1
BLE_XRES: length 3
  BOTTOM w0.152: R26.1 113.67,6.12 113.41,6.38 112.73,6.38 112.37,6.73 U4.14
I2C_SCL: length 127.6
  TOP w0.152: v1(42.09,10.77) 42.09,11.35 41.45,11.99 39.75,11.99 38.56,10.79 34.92,10.79 v1(34.9,10.82) ; v1(103.53,16.08) 103.8,15.81 103.8,14.4 103.79,14.4 103.79,13.94 103.8,13.93 103.8,11.41 v1(104.64,10.56)
  TOP w0.203: v1(19.72,6.62) 20.14,7.04 U1.38
  BOTTOM w0.152: v1(103.53,16.08) 104.88,14.73 104.88,14.25 105.08,14.05 U4.3 ; v1(42.09,10.77) 50.42,10.77 R14.2 52.15,9.04 58.81,9.04 61.27,11.51 70.1,11.51 70.44,11.84 77.53,11.84 78.92,13.23 82.06,13.23 82.3,12.99 82.3,12.99 82.97,12.32 84.57,12.32 84.91,11.98 85.93,11.98 85.94,11.98 87.94,11.98 88.64,11.28 94.95,11.28 95.23,11 98.86,11 98.86,11 99.11,11 100.03,11.91 101.25,11.91 102.03,11.13 104.08,11.13 v1(104.64,10.56) ; U3.3 24.65,19.49 24.61,19.45
  BOTTOM w0.203: J9.4 23.33,21.42 23.94,21.42 24.61,20.75 24.61,19.45 24.35,19.19 24.35,17.11 25.29,16.18 26.47,16.18 26.99,16.7 27.72,16.7 27.79,16.61 28.71,15.69 30.98,15.69 31.39,16.11 33.65,16.11 34.9,14.86 v1(34.9,10.82) 34.87,10.79 34.87,10.06 32.8,7.99 30.09,7.99 29.8,8.28 23.14,8.28 21.38,6.52 19.82,6.52 v1(19.72,6.62)
I2C_SDA: length 129.7
  TOP w0.152: v1(57.65,11.37) 60.03,11.37 v1(60.14,11.25) ; v1(105.28,11.18) 105.28,13.23 104.35,14.17 v1(104.34,14.17) ; v1(35.46,15.65) 35.64,15.82 39.17,15.82 39.55,15.44 39.55,14.81 39.8,14.55 41.25,14.55 42.11,13.69 v1(42.11,13.31)
  TOP w0.203: v1(26.38,21.44) 26.38,21.53 26.37,21.54 26.37,22.69 25.41,23.65 20.6,23.65 19.99,23.04 J9.5 ; v1(20.45,5.88) 20.54,5.96 20.54,6.9 20.53,6.91 20.53,7.47 20.54,7.48 U1.39
  BOTTOM w0.152: v1(60.14,11.25) 60.27,11.38 60.4,11.38 60.83,11.81 69.98,11.81 70.31,12.15 77.4,12.15 78.79,13.54 82.18,13.54 82.43,13.3 82.43,13.3 83.1,12.62 84.7,12.62 84.98,12.34 88.01,12.34 88.77,11.58 95.08,11.58 95.36,11.3 98.99,11.3 99.9,12.22 101.37,12.22 102.16,11.43 105.03,11.43 105.28,11.18 v1(105.28,11.18) ; v1(57.65,11.37) 57.21,10.93 52.24,10.93 51.79,11.38 50.85,11.38 R17.2 47.99,12.32 47.77,12.53 47.01,13.28 42.14,13.28 v1(42.11,13.31) ; v1(104.34,14.17) 104.34,13.73 104.78,13.28 U4.4
  BOTTOM w0.203: 26.37,17.65 26.87,17.14 27.83,17.14 28.88,16.1 30.81,16.1 31.22,16.52 34.59,16.52 v1(35.46,15.65) 35.47,15.63 35.47,10.08 32.97,7.58 29.92,7.58 29.63,7.87 23.24,7.87 21.24,5.88 v1(20.45,5.88) ; U3.6 26.25,18.49 26.11,18.62
  BOTTOM w0.229: v1(26.38,21.44) 26.38,21.42 26.11,21.16 26.11,17.9 26.37,17.65
KP_DM: length 8.7
  TOP w0.229: R5.1 13.41,13.08 12.05,13.08 10.7,11.73 6.48,11.73 J6.2
KP_DM_P: length 3.5
  TOP w0.152: U1.23 17.43,13.26 17.42,13.27 16.61,13.27 16.48,13.15 16.45,13.15
  TOP w0.229: R5.2 15.18,13.15 16.45,13.15
KP_DP: length 8.7
  TOP w0.229: R4.1 13.41,13.72 11.79,13.72 10.44,12.37 6.51,12.37 J6.3
KP_DP_P: length 3.5
  TOP w0.152: U1.22 17.43,13.67 17.42,13.66 16.61,13.66 16.48,13.78 16.45,13.78
  TOP w0.229: R4.2 15.05,13.78 16.45,13.78
KP_P0_0: length 12.8
  TOP w0.203: U1.48 24.14,7.1 24.38,6.86 24.38,5.52 21.23,2.37 21.23,1.39 20.51,0.66 18.69,0.66 17.45,1.91
KP_P0_1: length 17.2
  TOP w0.203: v1(23.7,0.99) 23.77,1.07 23.77,3.68 24.82,4.72 24.82,7.09 24.54,7.36 U1.49
  BOTTOM w0.203: 14.91,1.91 16.15,0.66 23.37,0.66 v1(23.7,0.99)
KP_P0_2: length 2.9
  TOP w0.203: U1.50 24.94,7.5 25.76,6.68 C15.1
KP_P0_3: length 4.3
  TOP w0.203: C16.1 27.71,6.73 27.25,7.19 25.91,7.19 25.34,7.75 U1.51
KP_P0_4: length 2.9
  TOP w0.203: U1.53 26,9.27 C7.2
KP_P1_6: length 5.2
  TOP w0.203: R2.2 15.9,17.17 v1(15.95,17.12) 15.95,17.07 17.75,15.27 U1.18
  BOTTOM w0.203: R2.2 15.9,17.17 v1(15.95,17.12)
KP_P1_7: length 4.9
  TOP w0.203: R3.2 15.91,16.13 v1(15.94,16.15) 16.23,16.15 17.52,14.86 U1.19
  BOTTOM w0.203: R3.2 15.62,16.13 15.65,16.15 v1(15.94,16.15)
KP_P2_6: length 7.1
  TOP w0.203: v1(27.25,17.86) 27.95,17.16 27.95,15.57 27.73,15.35 26.92,15.35 26.35,15.92 U1.1
  BOTTOM w0.203: U3.5 26.99,18.99 27.38,18.59 27.38,17.99 v1(27.25,17.86)
KP_P2_7: length 3.6
  TOP w0.203: v1(25.03,17.39) 25.03,16.64 24.94,16.56 U1.2
  BOTTOM w0.203: U3.2 25.08,18.99 24.85,18.76 24.85,17.57 v1(25.03,17.39)
KP_P3_0: length 17
  TOP w0.203: U1.29 17.16,10.87 16.93,10.64 v1(16.93,10.63)
  BOTTOM w0.203: v1(16.93,10.63) 16.95,10.63 18.83,8.74 18.83,6.54 21.82,3.56 23.22,3.56 23.62,3.15 25.88,3.15 27.13,1.91 27.61,1.91
KP_P3_1: length 3.8
  TOP w0.203: U1.30 17.58,10.46 17.17,10.06 16.58,10.06 16.42,9.9 v1(16.42,9.9)
  BOTTOM w0.203: R19.1 15.9,9.27 16.42,9.79 v1(16.42,9.9)
KP_P3_4: length 14.4
  TOP w0.203: U1.33 17.68,9.27 17.09,8.67 17.06,8.67 16.82,8.44 v1(16.82,8.36)
  BOTTOM w0.203: 25.07,1.91 24.29,1.91 23.05,3.15 21.65,3.15 18.43,6.37 18.43,8.42 18.01,8.83 17.24,8.83 16.82,8.42 v1(16.82,8.36)
KP_P3_5: length 9.4
  TOP w0.203: U1.34 18.29,8.49 17.94,8.14 v1(17.75,8.14)
  BOTTOM w0.203: 22.53,1.91 22.23,2.21 22.01,2.21 17.99,6.23 17.99,7.9 v1(17.75,8.14)
KP_P3_6: length 7
  TOP w0.203: U1.36 19.34,7.3 18.94,6.9 18.94,6.4 ; v1(19.14,4.13) 19.25,4.24 19.25,4.32
  TOP w0.229: 18.94,6.4 19.25,6.09 19.25,4.32
  BOTTOM w0.203: 19.99,1.91 19.14,2.76 v1(19.14,4.13)
KP_P12_5: length 8.9
  TOP w0.203: U1.4 24.14,15.92 24.14,16.5 23.8,16.84 22.83,16.84 22.6,17.07 22.6,20.45 23.29,21.15 23.33,21.15 24.41,22.23 J9.3
KP_VCCD: length 20.5
  TOP w0.229: 17.25,11.63 17.68,12.06 U1.26 ; v1(27.18,10.08) 27.18,10.38 26.7,10.87 U1.57
  TOP w0.508: C8.1 14.99,9.63 16.18,10.82 v1(16.18,11.25) 16.24,11.25 16.61,11.63 17.25,11.63
  BOTTOM w0.635: v1(16.18,11.25) 16.18,11.25 16.34,11.42 17.77,11.42 19.53,9.65 25.28,9.65 25.71,10.08 v1(27.18,10.08) 27.19,10.08 27.37,9.91 28.77,9.91 C27.2
KP_VDD: length 88.1
  TOP w0.229: U1.44 22.54,7.38 21.5,6.34 ; 17.02,12.32 17.56,12.87 U1.24 ; 18.89,17.04 18.94,16.99 U1.17 ; 26.94,14.67 26.86,14.67 26.66,14.86 U1.67 ; U1.59 27.34,11.67 ; 21.49,6.32 21.42,6.26 21.42,5.12 v1(21.49,5.05)
  TOP w0.254: U1.52 26.72,8.86 27.08,8.51 ; 28.18,11.61 28.12,11.67 27.34,11.67 ; U1.35 18.65,8.21 18.45,8.01 18.45,7.62 18.2,7.37 18.16,7.37
  TOP w0.381: 26.94,14.67 28.53,14.67 C4.1 ; 18.9,17.04 18.82,17.04 18.66,17.2 C1.1 ; 18.9,17.04 18.89,17.04 18.91,17.04 19.34,17.47 19.34,18.8 20.04,19.49 R1.1 ; 18.9,17.04 v1(19.06,17.04) ; C11.1 27.58,8.51 27.08,8.51
  TOP w0.508: 18.03,3.3 18.31,3.59 18.31,5.02 17.64,5.69 C14.1 17.53,6.73 18.16,7.37 ; 18.03,3.3 17.94,3.39 15.98,3.39 ; 18.03,3.3 20.86,3.3 21.49,3.93 v1(21.49,5.05) ; 17.02,12.32 16.03,12.32 v1(15.91,12.2) ; v1(31.67,8.61) 31.67,8.61 31.62,8.61 31.24,8.23 29.54,8.23 28.8,7.49 C11.1 28.8,6.41 v1(28.85,6.36) ; 14.99,11.37 14.99,11.43 14.48,11.94 12.39,11.94 11.68,11.23 11.68,11.17 11.6,11.08 11.6,10.4
  TOP w0.635: 28.18,11.61 28.21,11.61 28.26,11.56 C5.1 28.89,11.65 28.89,12.73 v1(28.85,12.78) ; 11.6,10.4 11.62,10.37 11.62,8.94 11.64,8.92 11.64,8.63 13,7.26 13,5.32 14.93,3.39 15.98,3.39 ; C4.1 v1(28.85,14.06) ; v1(21.49,5.05) 21.49,6.32 21.5,6.34 ; v1(15.91,12.2) 15.82,12.2 14.99,11.37 C6.1
  BOTTOM w0.381: C33.1 22.91,5.13 23.64,5.87 25.06,5.87 C32.1
  BOTTOM w0.508: C32.1 25.62,5.85 26.13,6.36 v1(28.85,6.36) ; v1(21.49,5.05) 21.54,5.11 C33.1 ; v1(19.06,17.04) 19,17.11 19,17.34 17.67,18.67 16.76,18.67
  BOTTOM w0.635: C25.1 15.02,11.32 v1(15.91,12.2) 17.16,12.2 19.06,14.11 v1(19.06,17.04) ; 28.85,12.79 29.71,12.79 30.39,12.1 C23.1 31.71,11.56 32.31,10.96 32.31,9.24 v1(31.67,8.61) ; 28.85,12.79 v1(28.85,12.78) ; 28.85,12.79 v1(28.85,14.06) ; 16.76,18.67 R7.1
KP_XRES: length 3.6
  TOP w0.203: R1.2 21.04,18.2 C2.1 21.06,17.48 21.74,16.79 U1.10
P0_0: length 12.7
  TOP w0.178: J2.10 89.2,3.8 86.93,3.82 84.44,3.82 80.76,7.49
P0_1: length 15
  TOP w0.178: J2.9 91.42,4.14 88.89,4.14 86.93,4.15 84.82,4.15 81.12,7.85
P0_2: length 17.3
  TOP w0.178: J2.8 93.63,4.47 89.53,4.47 88.77,4.47 86.93,4.48 85.16,4.48 81.47,8.17 U2.41
P0_3: length 19.7
  TOP w0.178: 81.82,8.55 85.57,4.81 86.93,4.81 88.77,4.8 89.67,4.8 89.67,4.8 95.84,4.8 J2.7
P0_4: length 22
  TOP w0.152: U2.43 84.99,6.1 C12.1
  TOP w0.178: C12.1 87.07,5.14 88.77,5.14 89.81,5.13 98.04,5.13 J2.6
P0_5: length 25.4
  TOP w0.152: 82.53,9.26 84.5,7.29 C9.1
  TOP w0.178: C9.1 86.13,7.29 86.79,7.95 88.65,7.95 89.26,7.34 89.26,6.45 90.25,5.46 100.25,5.46 J2.5
P0_6: length 27.3
  TOP w0.178: 82.88,9.62 84.07,8.43 88.75,8.43 89.59,7.59 89.59,6.59 90.38,5.79 100.39,5.79 102.98,3.2 105.05,3.2 J2.4
P0_7: length 57.3
  TOP w0.152: SW1.1A 61.41,13.56 61.41,10.76 v1(61.39,10.74) 61.45,10.69 SW1.1B
  TOP w0.178: J2.3 108.22,1.91 106.49,3.63 103.61,3.63 101.12,6.12 90.52,6.12 89.92,6.73 89.92,7.77 88.93,8.76 84.44,8.76 U2.46
  TOP w0.203: U2.46 82.59,10.62 77.75,10.62 v1(77.53,10.4)
  BOTTOM w0.152: v1(61.39,10.74) 61.85,11.2 70.23,11.2 70.57,11.54 77.28,11.54 77.5,11.32 77.5,10.42 v1(77.53,10.4)
P1_0: length 20.3
  TOP w0.203: 80.76,16.64 82.9,18.77 85.1,18.77 85.81,19.48 95.99,19.48 J1.7
P1_1: length 17.9
  TOP w0.203: 80.41,16.99 82.54,19.13 84.95,19.13 85.66,19.84 93.8,19.84 J1.8
P1_2: length 15.6
  TOP w0.203: J1.9 91.62,20.19 85.51,20.19 84.8,19.48 82.19,19.48 U2.60
P1_3: length 13.3
  TOP w0.203: 79.7,17.7 81.84,19.84 84.65,19.84 85.36,20.55 89.43,20.55 J1.10
P1_4: length 11
  TOP w0.203: U2.62 81.49,20.19 84.51,20.19 85.22,20.9 87.25,20.9 J1.11
P1_5: length 8.6
  TOP w0.203: 78.99,18.4 81.14,20.55 84.35,20.55 85.06,21.26 85.06,21.26 J1.12
P1_6: length 32.7
  TOP w0.152: U2.64 78.16,19.24 78.16,19.25 v1(78.14,19.27)
  TOP w0.203: J1.13 82.25,20.98 80.86,20.98 U2.64
  BOTTOM w0.152: R15.2 56.44,12.13 56.44,13.92 61.52,19 77.86,19 v1(78.14,19.27)
P1_7: length 15.5
  TOP w0.152: C3.1 71.03,18.72 v1(70.05,19.7)
  TOP w0.203: U2.1 75.24,19.38 75.24,19.67 v1(75.54,19.97) 75.84,20.27 78.99,20.27 J1.14
  BOTTOM w0.203: v1(75.54,19.97) 75.27,19.7 v1(70.05,19.7)
P2_0: length 6.6
  TOP w0.203: 75.51,18.4 74.73,19.19 74.73,20.09 75.56,20.93 77.11,20.93 J1.15
P2_1: length 5.3
  TOP w0.203: U2.3 74.12,19.09 74.12,20.47 J1.16
P2_2: length 5.1
  TOP w0.203: 74.8,17.7 73.38,19.12 73.38,22.17 J1.17
P2_3: length 6.4
  TOP w0.203: J1.18 72.9,20.12 72.9,18.87 74.43,17.34 U2.5
P2_4: length 8.6
  TOP w0.203: U2.6 72.47,18.62 72.47,19.68 71.2,20.95 69.52,20.95 J1.19
P2_5: length 10.8
  TOP w0.203: J1.20 67.67,20.27 70.97,20.27 72.01,19.23 72.01,18.37 73.74,16.64
P2_6: length 12.7
  TOP w0.203: J1.21 64.45,20.95 64.69,20.95 64.7,20.95 65.09,20.95 65.5,20.53 65.5,20.53 68.98,17.06 72.61,17.06 U2.8
P2_7: length 15
  TOP w0.203: J1.22 62.27,20.59 64.05,20.59 64.06,20.59 64.94,20.59 65.15,20.39 65.15,20.38 68.83,16.7 72.27,16.7 73.04,15.93
P3_0: length 37.3
  TOP w0.152: U2.18 70.88,10.32 70.21,9.65 67.84,9.65 66.85,10.64 v1(65.77,10.64) ; v1(54.78,5.3) 54.53,5.54 54.53,9.88 53.94,10.48 53.52,10.48 51.68,12.32 R27.1
  BOTTOM w0.152: v1(54.78,5.3) 55.83,5.3 56.76,4.44 57.73,4.44 57.73,4.44 59.95,4.44 65.77,10.25 v1(65.77,10.64) ; 49.47,3.44 J2.27
  BOTTOM w0.178: v1(54.78,5.3) 54.32,5.3 54.06,5.05 54.06,4.66 52.96,3.56 49.58,3.56 49.47,3.44
P3_1: length 37.1
  TOP w0.152: R28.1 52.16,14.22 52.31,14.07 52.31,12.12 53.65,10.78 54.16,10.78 55.49,9.46 v1(55.49,4.76) ; v1(66.53,10.03) 67.24,9.32 70.61,9.32 71.26,9.97
  BOTTOM w0.152: v1(66.53,10.03) 65.98,10.03 60.08,4.14 57.6,4.14 56.63,4.14 56.11,4.14 55.49,4.76 v1(55.49,4.76) 55.48,4.76 54.88,4.76 53.26,3.15 51.71,3.15 J2.26
P3_2: length 70.9
  TOP w0.152: v1(100.03,11.04) 100.28,11.29 103.44,11.29 104.09,10.64 104.09,10.34 104.42,10.01 104.95,10.01 105.84,10.9 105.84,14.67 105.99,14.82 SW4.4
  TOP w0.178: v1(72.24,10.9) 72.24,10.23 U2.20
  BOTTOM w0.152: v1(72.24,10.9) 70,10.9 68.59,9.49 65.87,9.49 60.21,3.83 57.04,3.83 56.51,3.83 54.93,3.83 J2.25 ; R16.1 100.03,9.36 v1(100.03,11.04)
  BOTTOM w0.178: v1(72.24,10.9) 73.05,10.9 73.48,10.46 73.48,10.46 73.81,10.13 73.81,10.13 74.18,9.77 77.78,9.77 78.14,10.13 78.14,11.04 77.98,11.2 77.98,11.84 79.05,12.92 81.93,12.92 82.17,12.67 82.17,12.67 82.79,12.05 82.79,12.05 83.03,11.81 84.63,11.81 84.78,11.66 87.7,11.66 87.91,11.46 87.91,10.96 88.09,10.78 94.6,10.78 94.82,10.57 94.82,10.57 95.25,10.13 97.76,10.13 98.6,9.3 R16.1
P3_3: length 72.5
  TOP w0.152: SW4.1 102.55,15.97 102.29,16.23 v1(101.93,16.23) ; v1(68,13.39) 68,12.11 68.65,11.46 70.2,11.46 70.29,11.56 72.36,11.56 73.03,10.89 v1(73.03,10.1) 72.81,10.1 71.97,9.26 ; v1(99.34,16.61) 99.82,16.13 99.82,12.86 v1(99.78,12.82)
  BOTTOM w0.152: J2.24 57.17,3.53 60.33,3.53 65.99,9.18 68.72,9.18 69.63,10.09 73.02,10.09 v1(73.03,10.1) ; v1(99.34,16.61) 99.7,16.26 R18.1 101.85,16.26 101.88,16.23 v1(101.93,16.23) ; v1(68,13.39) 68.33,13.72 71.68,13.72 72.29,13.1 74.11,13.1 74.33,13.32 77.28,13.32 78.41,14.46 80.17,14.46 80.18,14.46 82.57,14.46 83.41,13.61 85.08,13.61 85.45,13.26 89.15,13.26 89.57,12.84 94.91,12.84 95.44,13.37 96.17,13.37 96.8,12.75 99.71,12.75 v1(99.78,12.82)
P3_4: length 17.1
  TOP w0.152: U2.22 71.33,7.91 69.26,7.91 v1(69.24,7.89)
  BOTTOM w0.152: v1(69.24,7.89) 67.35,7.89 63.16,3.71 61.75,3.71 61.26,3.22 59.48,3.22 58.17,1.91 J2.23
P3_5: length 14.8
  TOP w0.152: U2.23 72.66,8.55 71.72,7.61 70.07,7.61 69.58,7.11 v1(69.58,7.06)
  BOTTOM w0.152: v1(69.58,7.06) 67.31,7.06 63.55,3.3 62.03,3.3 J2.22
P3_6: length 12.5
  TOP w0.152: v1(70.46,6.94) 70.46,6.97 70.71,7.21 72.06,7.21 73.04,8.19 73.04,8.2
  BOTTOM w0.152: v1(70.46,6.94) 69.31,5.79 67.06,5.79 J2.21
P3_7: length 10.2
  TOP w0.152: U2.25 73.38,7.85 72.34,6.81 71.55,6.81 71.16,6.41 v1(71.16,6.39)
  BOTTOM w0.152: v1(71.16,6.39) 69.85,5.08 68.88,5.08 J2.20
P4_0: length 32.5
  TOP w0.152: U2.27 74.07,7.14 73,6.07 v1(72.24,6.07) ; v1(49.99,8.56) 53.77,8.56 54.23,8.1 54.23,4.47 55.57,3.12 66.4,3.12 67.61,1.91 J2.19
  BOTTOM w0.152: R14.1 49.91,8.64 v1(49.99,8.56) ; v1(72.24,6.07) 68.25,2.08 J2.19
P4_1: length 33.6
  TOP w0.152: v1(73.01,5.5) 73.09,5.5 74.38,6.79 U2.28 ; v1(52.86,12.98) 52.86,12.01 53.78,11.09 54.7,11.09 55.88,9.91 55.88,7.45 57.56,5.78 57.56,4.35 58.44,3.47 69.23,3.47 J2.18
  BOTTOM w0.152: R17.1 52.2,12.32 v1(52.86,12.98) ; v1(73.01,5.5) 73.01,5.42 70.79,3.2 J2.18
P4_2: length 11.9
  TOP w0.152: 74.8,6.43 73.36,4.99 73.36,4.71 v1(73.38,4.69) 73.32,4.63 70.83,4.63 C10.1
  BOTTOM w0.152: J2.17 73.08,2.16 73.08,4.32 73.38,4.63 v1(73.38,4.69)
P4_3: length 12.2
  TOP w0.203: 74.22,4.29 74.22,5.14 U2.30 ; 74.22,4.29 74.04,4.11 ; 74.22,4.29 74.22,3.96 ; 74.04,4.11 74.07,4.11 74.22,3.96 ; 74.04,4.11 70.51,4.11 69.47,5.16 C13.1 ; J2.16 74.22,3.56 74.22,3.96
P4_4: length 6.3
  TOP w0.203: 75.51,5.73 74.73,4.94 74.73,4.52 75.95,3.3 77.01,3.3 J2.15
P4_5: length 6.5
  TOP w0.203: U2.32 77.27,3.96 78.89,3.96 J2.14
P4_6: length 6.3
  TOP w0.178: U2.33 80.69,3.33 82.07,3.33 J2.13
P4_VDDA: length 22.3
  TOP w0.254: U2.56 81.47,15.89 80.44,14.86 80.19,14.86
  TOP w0.305: v1(82.84,17.25) 82.79,17.25 U2.56 ; v1(74.4,14.3) 74.37,14.33 73.22,14.33 U2.11
  TOP w0.508: v1(76.89,14.86) 80.19,14.86
  BOTTOM w0.508: C18.1 83.25,16.84 v1(82.84,17.25) ; C18.1 83.91,16.83 C21.1 ; C18.1 83.9,17.37 84.24,17.72 85.42,17.72 85.92,18.21 L1.1 ; C17.1 73.81,16.8 C20.1 73.81,14.86 74.37,14.3 v1(74.4,14.3) 74.41,14.28 76.31,14.28 v1(76.89,14.86) 77.36,15.33 R24.1
P4_VDDD: length 24.3
  TOP w0.254: U2.50 83.59,13.8 81.94,12.14
  TOP w0.508: v1(77.1,13.98) 80.48,13.98 81.77,12.69 81.94,12.53 81.94,12.12 v1(81.95,12.1)
  BOTTOM w0.508: R24.2 78.85,15.58 77.25,13.98 v1(77.1,13.98) ; R25.1 82.17,9.51 L2.1 80.48,9.51 79.82,8.85 R21.1
  BOTTOM w0.635: R25.1 83.43,8.26 R23.1 ; v1(81.95,12.1) 81.94,12.11 81.94,12.11 81.73,12.32 C22.1 C24.1 L2.1
P4_VDDIO: length 45.6
  TOP w0.254: v1(74.71,8.43) 74.67,8.43 73.74,7.49
  TOP w0.508: J1.29 46.94,18.14 53.03,18.14 62.04,18.14 62.04,18.14 62.69,18.14 62.69,18.14 63.21,18.14 TP3.1 66.93,14.41 68.62,14.41 70.66,12.37 73.39,12.37 74.76,11 74.76,8.49 74.71,8.44 v1(74.71,8.43)
  BOTTOM w0.381: R21.2 C31.1 76.52,7.81 C29.1 74.93,8.2 v1(74.71,8.43)
P5_0: length 31.5
  TOP w0.203: J1.2 108.56,19.35 100.71,19.35 99.06,17.7 86.78,17.7 U2.51
P5_1: length 29.2
  TOP w0.203: J1.3 106.43,19.76 100.3,19.76 98.6,18.06 86.44,18.06 82.89,14.51 82.88,14.51
P5_2: length 26.9
  TOP w0.203: J1.4 104.29,20.17 99.9,20.17 98.15,18.41 86.29,18.41 85.58,17.7 85.36,17.7 82.53,14.87
P5_3: length 24.5
  TOP w0.203: U2.54 85.01,18.06 85.43,18.06 86.14,18.77 97.69,18.77 99.44,20.52 102.11,20.52 J1.5
P5_5: length 22.2
  TOP w0.203: 81.82,15.58 82.75,16.5 82.92,16.5 84.83,18.41 85.27,18.41 85.98,19.13 97.1,19.13 98.93,20.95 100,20.95 J1.6
P6_0: length 16.9
  TOP w0.203: 71.97,14.87 71.95,14.87 71.26,15.56 70.93,15.56 70.14,16.34 68.68,16.34 64.79,20.24 64.21,20.24 64.06,20.23 60.09,20.23 J1.23
P6_1: length 19.3
  TOP w0.203: J1.24 57.9,19.88 64.06,19.88 64.35,19.88 64.64,19.88 68.53,15.99 70,15.99 70.78,15.2 70.93,15.2 U2.13
P6_2: length 21.6
  TOP w0.203: J1.25 55.8,19.43 64.3,19.43 64.3,19.43 64.59,19.43 68.39,15.63 69.79,15.63 71.26,14.16
P6_4: length 23.9
  TOP w0.203: U2.15 69.44,15.28 68.24,15.28 64.48,19.04 53.66,19.04 J1.26
P6_5: length 26.3
  TOP w0.203: J1.27 51.51,18.65 53.4,18.64 61.83,18.64 61.83,18.65 62.9,18.65 62.91,18.64 64.37,18.64 68.09,14.92 69.09,14.92 70.56,13.45
P7_0: length 41.2
  TOP w0.152: v1(54.41,15.49) 54.61,15.7 61.81,15.7 v1(62.84,14.67)
  TOP w0.178: U2.37 83.72,3.12 84.81,3.12 J2.12
  TOP w0.203: U2.37 80.06,6.81 79.22,7.65 79.22,8.56 78.61,9.17 77.37,9.17 72.89,13.65 v1(72.65,13.65)
  BOTTOM w0.152: v1(72.65,13.65) 71.98,14.33 63.18,14.33 v1(62.84,14.67) ; R11.1 53.77,16.13 v1(54.41,15.49)
P7_1: length 43.8
  TOP w0.152: v1(54.91,14.48) 55.5,15.06 61.67,15.06 v1(61.74,14.98)
  TOP w0.178: 80.41,7.14 84.07,3.48 86.92,3.48 87,3.48 J2.11
  TOP w0.203: v1(73.73,13.71) 73.72,13.7 73.72,13.32 77.41,9.63 78.66,9.63 79.63,8.66 79.63,7.9 80.39,7.14 80.41,7.14
  BOTTOM w0.152: v1(61.74,14.98) 61.98,15.21 63.31,15.21 63.89,14.63 72.78,14.63 73.71,13.71 v1(73.73,13.71) ; R13.1 54.66,14.22 v1(54.91,14.48)
RESET: length 136.9
  TOP w0.152: 95.99,9.8 95.8,9.99 v1(95.8,11.94) ; 95.99,9.8 95.78,9.6 v1(95.78,8.39) ; 95.99,9.8 J5.10
  TOP w0.203: SW3.1A SW3.1B 34.51,3.14 33.32,4.32 33.32,14.61 v1(33.55,14.83) 36.32,12.06 38.02,12.06 ; U1.3 24.54,16.99 24.06,17.47 v1(23.27,17.47)
  BOTTOM w0.152: R26.2 115.16,4.5 114.45,3.78 106.71,3.78 104.55,5.94 104.55,6.65 103.39,7.81 96.37,7.81 v1(95.78,8.39) 95.2,7.81 93.05,7.81 92.06,8.8 90.16,8.8 89.66,8.31 R20.2 ; 38.02,12.06 38.07,12.01 43.05,12.01 43.1,12.06 43.99,12.06 44.02,12.04 45.75,12.04 46.71,11.07 51.66,11.07 52.61,10.13 52.61,9.83 53.09,9.35 57.46,9.35 60.28,12.17 69.9,12.17 70.19,12.45 77.27,12.45 78.66,13.84 82.31,13.84 82.56,13.6 82.56,13.6 83.2,12.95 84.88,12.95 85.17,12.67 85.17,12.67 85.19,12.65 88.34,12.65 88.91,12.08 95.66,12.08 v1(95.8,11.94)
  BOTTOM w0.203: v1(33.55,14.83) 32.73,15.66 31.56,15.66 31.18,15.29 25.07,15.29 23.27,17.09 v1(23.27,17.47)
SWDCLK: length 97.6
  TOP w0.152: SW4.2 101.22,12.32 100.95,12.59 v1(100.95,13.86) ; v1(65.07,13.34) 63.96,14.45 63.96,15.76 62.37,17.35 46.61,17.35 46.58,17.38 45.88,17.38 J3.4 ; v1(98.79,15.91) 99.18,15.91 99.47,15.62 99.47,13.77 99.31,13.61 J5.4 96.24,13.61 95.78,13.16 v1(95.78,12.83)
  TOP w0.203: U1.47 23.74,8.21 23.74,6.72 23.7,6.67 v1(23.7,6.59)
  BOTTOM w0.152: v1(65.07,13.34) 65.65,12.76 77.14,12.76 78.54,14.15 82.44,14.15 82.68,13.9 82.68,13.9 83.28,13.31 84.96,13.31 85.3,12.97 85.3,12.97 85.32,12.95 88.44,12.95 88.8,12.95 89.03,12.95 89.45,12.53 95.49,12.53 v1(95.78,12.83) ; J3.4 J7.4 ; v1(100.95,13.86) 100.76,14.05 R18.2 99.94,14.76 v1(98.79,15.91)
  BOTTOM w0.203: v1(23.7,6.59) 24.14,7.04 29.31,7.04 29.58,6.77 32.29,6.77 32.29,6.77 32.63,6.77 33.3,6.76 36.68,10.13 36.68,13.26 J7.4
SWDIO: length 116
  TOP w0.152: J7.5 38.18,17.3 42.95,17.3 J3.5 43.65,17.69 46.7,17.69 46.74,17.65 62.24,17.65 62.49,17.66 64.27,15.87 64.27,14.96 65.3,13.93 68.41,13.93 70.48,11.86 72.9,11.86 74.04,10.72 v1(74.04,10.69) ; SW4.5 107.15,11.45 106.76,11.05 106.42,11.05 105.07,9.7 104.87,9.7 104.29,9.7 103.79,10.21 103.79,10.51 103.45,10.85 101.19,10.85 v1(101.09,10.74) 100.84,10.49 99.77,10.49 99.48,10.78 99.48,11.65 100.34,12.51
  TOP w0.178: 97.81,16.71 J5.2 ; 97.81,16.71 97.18,17.35 90.58,17.35 89.26,16.03 89.26,15.44 87.56,13.74 85.37,13.74 82.59,10.96 76.96,10.96 76.93,10.99 v1(76.86,10.99) ; 97.81,16.71 98.42,17.32 99.82,17.32 100.34,16.8 100.34,12.51
  TOP w0.203: U1.46 23.34,7.41 22.53,6.6 v1(22.53,6.03)
  BOTTOM w0.152: v1(74.04,10.69) 74.07,10.67 76.47,10.67 76.79,10.99 v1(76.86,10.99) ; R16.2 101.46,10.38 v1(101.09,10.74)
  BOTTOM w0.203: v1(22.53,6.03) 22.53,6.41 23.56,7.44 29.48,7.44 29.75,7.18 32.46,7.18 33.14,7.17 36.27,10.31 36.27,15.39 J7.5
UART RX: length 54
  TOP w0.178: v1(23.67,19.56) 24.05,19.93 25.03,19.94 28.04,19.94 28.58,20.47 32.09,20.47 32.39,20.78 33.31,20.78
  TOP w0.203: 33.31,20.78 35.51,20.78 37.32,18.96 v1(37.59,18.96) ; v1(12.45,15.95) 13.23,15.16 16.59,15.16 17.28,14.47 U1.20
  BOTTOM w0.152: R13.2 48.51,14.22 v1(48.43,14.14) 45.43,14.14 43.66,15.9 v1(42.19,15.9) 40.84,17.25 39.98,17.25 38.56,18.67 37.89,18.67 v1(37.59,18.96)
  BOTTOM w0.203: v1(23.67,19.56) 23.67,19.56 23.67,19.55 23.5,19.55 22.84,20.22 17.79,20.22 17.44,20.57 17.44,22.21 ; 17.44,22.21 J9.6 ; 17.44,22.21 16.18,20.95 13.77,20.95 12.57,19.76 12.57,16.07 v1(12.45,15.95)
UART TX: length 55
  TOP w0.203: v1(11.79,16.59) 11.79,15.5 12.66,14.63 16.43,14.63 16.99,14.06 U1.21
  BOTTOM w0.152: v1(37.16,20.42) 37.16,20.32 38.38,19.1 38.71,19.1 40.23,17.58 41.4,17.58 v1(42.29,18.47) 43.97,18.47 46.43,16 48.4,16 v1(48.43,16.03) 48.53,16.13 R11.2
  BOTTOM w0.203: v1(37.16,20.42) 34.09,23.5 16.38,23.5 15.11,22.23 J9.7 14.3,22.23 12.13,20.06 12.13,16.93 v1(11.79,16.59)
VTARG: length 145.1
  TOP w0.381: 28.02,18.68 28.4,18.3 28.4,16.31 28.8,15.9 30.74,15.9 31.13,15.52 31.13,13.32 v1(31.07,13.26)
  TOP w0.508: R3.1 13.29,16.13 12.78,16.65 12.78,17.91 13.51,18.64 13.51,20.1 14.06,20.65 16.04,20.65 v1(16.3,20.39) ; v1(33.07,20.21) 32.28,19.42 29.07,19.42 28.33,18.68 27.02,18.68 26.88,18.54 23.54,18.54 23.36,18.71 v1(23.36,18.72) ; v1(91.04,6.68) 90.88,6.84 90.88,14.4 v1(91.77,15.29) ; v1(34.19,13.39) 33.96,13.16 33.96,8.94 35.92,6.99 J7.1 ; v1(57.71,8.33) 57.71,6.88 60.64,3.95 69.56,3.95 70.03,3.48 v1(73.65,3.48)
  TOP w0.635: v1(109.27,4.33) 109.23,4.37 106.27,4.37 104.88,5.77 104.88,6.53 104.24,7.16 101.17,7.16 100.69,6.68 v1(91.04,6.68) ; v1(91.77,15.29) 92.18,14.88 J5.1
  BOTTOM w0.381: J7.1 J3.1
  BOTTOM w0.508: v1(91.04,6.68) 87.84,3.48 73.66,3.48 73.65,3.48 v1(73.65,3.48) ; C19.1 92.15,15.67 v1(91.77,15.29) ; v1(34.19,13.39) 34.14,13.44 32.5,13.44 31.99,13.95 ; v1(16.3,20.39) 16.46,20.39 17.18,19.67 21.59,19.67 R8.1 22.66,19.39 23.32,18.73 23.35,18.73 23.36,18.71 v1(23.36,18.72)
  BOTTOM w0.635: v1(31.07,13.26) 31.36,13.26 31.99,13.89 D1.1 ; J3.1 J4.2 ; J4.2 50.47,7.81 51.11,8.45 55.73,8.45 56.74,8.45 57.59,8.45 v1(57.71,8.33) ; J4.2 50.47,4.81 R22.2 ; v1(109.27,4.33) L3.1 ; v1(33.07,20.21) 32.77,19.9 R6.1
N11032: length 12.1
  TOP w0.635: v1(9.5,7.57) 9.5,8.14 9.08,8.56 J6.1
  BOTTOM w0.508: v1(9.5,7.57) 9.56,7.5 9.59,7.5 11.13,7.5 12.22,7.5 12.35,7.37 12.36,7.37 F1.2 13.4,5.4 C34.1
N11130: length 3.6
  TOP w0.508: v1(29.16,16.77) 29.91,17.52 LED2.2
  BOTTOM w0.203: v1(29.16,16.77) 28.37,17.56 R9.1
N039981: length 10.4
  TOP w0.203: v1(27.27,16.02) 27.16,16.02 26.33,16.85 v1(26.06,16.85)
  BOTTOM w0.203: U3.1 25.36,17.95 26.06,17.24 v1(26.06,16.85) ; v1(27.27,16.02) 27.02,15.77 25.12,15.77 23.95,16.94 23.95,17.71 23.61,18.04 22.82,18.04 22.67,17.89 R8.2
N046484: length 1.8
  BOTTOM w0.203: R6.2 27.62,19.9 27.21,19.49 U3.4
N13017862: length 3.2
  TOP w0.508: LED1.2 54.52,13.39 v1(54.74,13.6)
  BOTTOM w0.508: LED1.2 54.52,13.39 v1(54.74,13.6)
N16779589: length 4.8
  TOP w0.203: v1(12.41,9.27) 12.41,8.93 14.15,7.19 LED3.2
  BOTTOM w0.203: v1(12.41,9.27) R19.2

## Copper pours and planes (outline as drawn; the poured copper is in the pictures)
GND_SIGNAL on TOP: 11.73,23.5 39.67,23.5 39.67,0.64 11.73,0.64 11.73,6.32 0.97,6.32 0.97,17.78 11.73,17.78 ; 16 cut-outs
GND_SIGNAL on TOP: 41.54,0.64 41.54,14.63 42.3,14.63 42.3,16.13 41.54,16.13 41.54,23.5 113.3,23.5 113.3,21.03 106.07,21.03 106.07,20.97 106.02,20.98 105.97,21 105.97,20.03 106.07,20.13 106.07,19.26 105.97,19.26 105.97,18.89 106.05,18.89 106.07,18.93 106.07,13.84 106,13.89 105.97,13.89 105.97,13.24 106,13.25 106.07,13.3 106.07,9.12 113.3,9.12 113.3,0.64 ; 85 cut-outs
GND_SIGNAL on BOTTOM: 11.73,0.64 11.73,6.35 0.97,6.35 0.97,17.78 11.73,17.78 11.73,23.5 39.67,23.5 39.67,0.64 ; 15 cut-outs
GND_SIGNAL on BOTTOM: 41.58,0.64 41.58,23.5 113.33,23.5 113.33,21.03 113.2,21.04 106.02,21.04 106.02,9.25 106.15,9.12 111.81,9.12 112.22,8.71 112.22,8.31 112.79,8.31 112.88,8.37 112.86,8.48 112.22,9.12 113.33,9.12 113.33,0.64 ; 81 cut-outs

## Text on the board
BOTTOM: L | 2 | 600-60250-01 REV04 SECONDARY SIDE
Ref Des/Assembly Bottom: SECONDARY SIDE | ASSEMBLY DRAWING | PSoC 4 M-SERIES | PROTOTYPING KIT | 620-60255-01
Board Geometry/Soldermask Bottom: 600-60250-01 REV04 SECONDARY SOLDERMASK
